# EAGLE board speaker_amp_single (EAGLE 6.3)
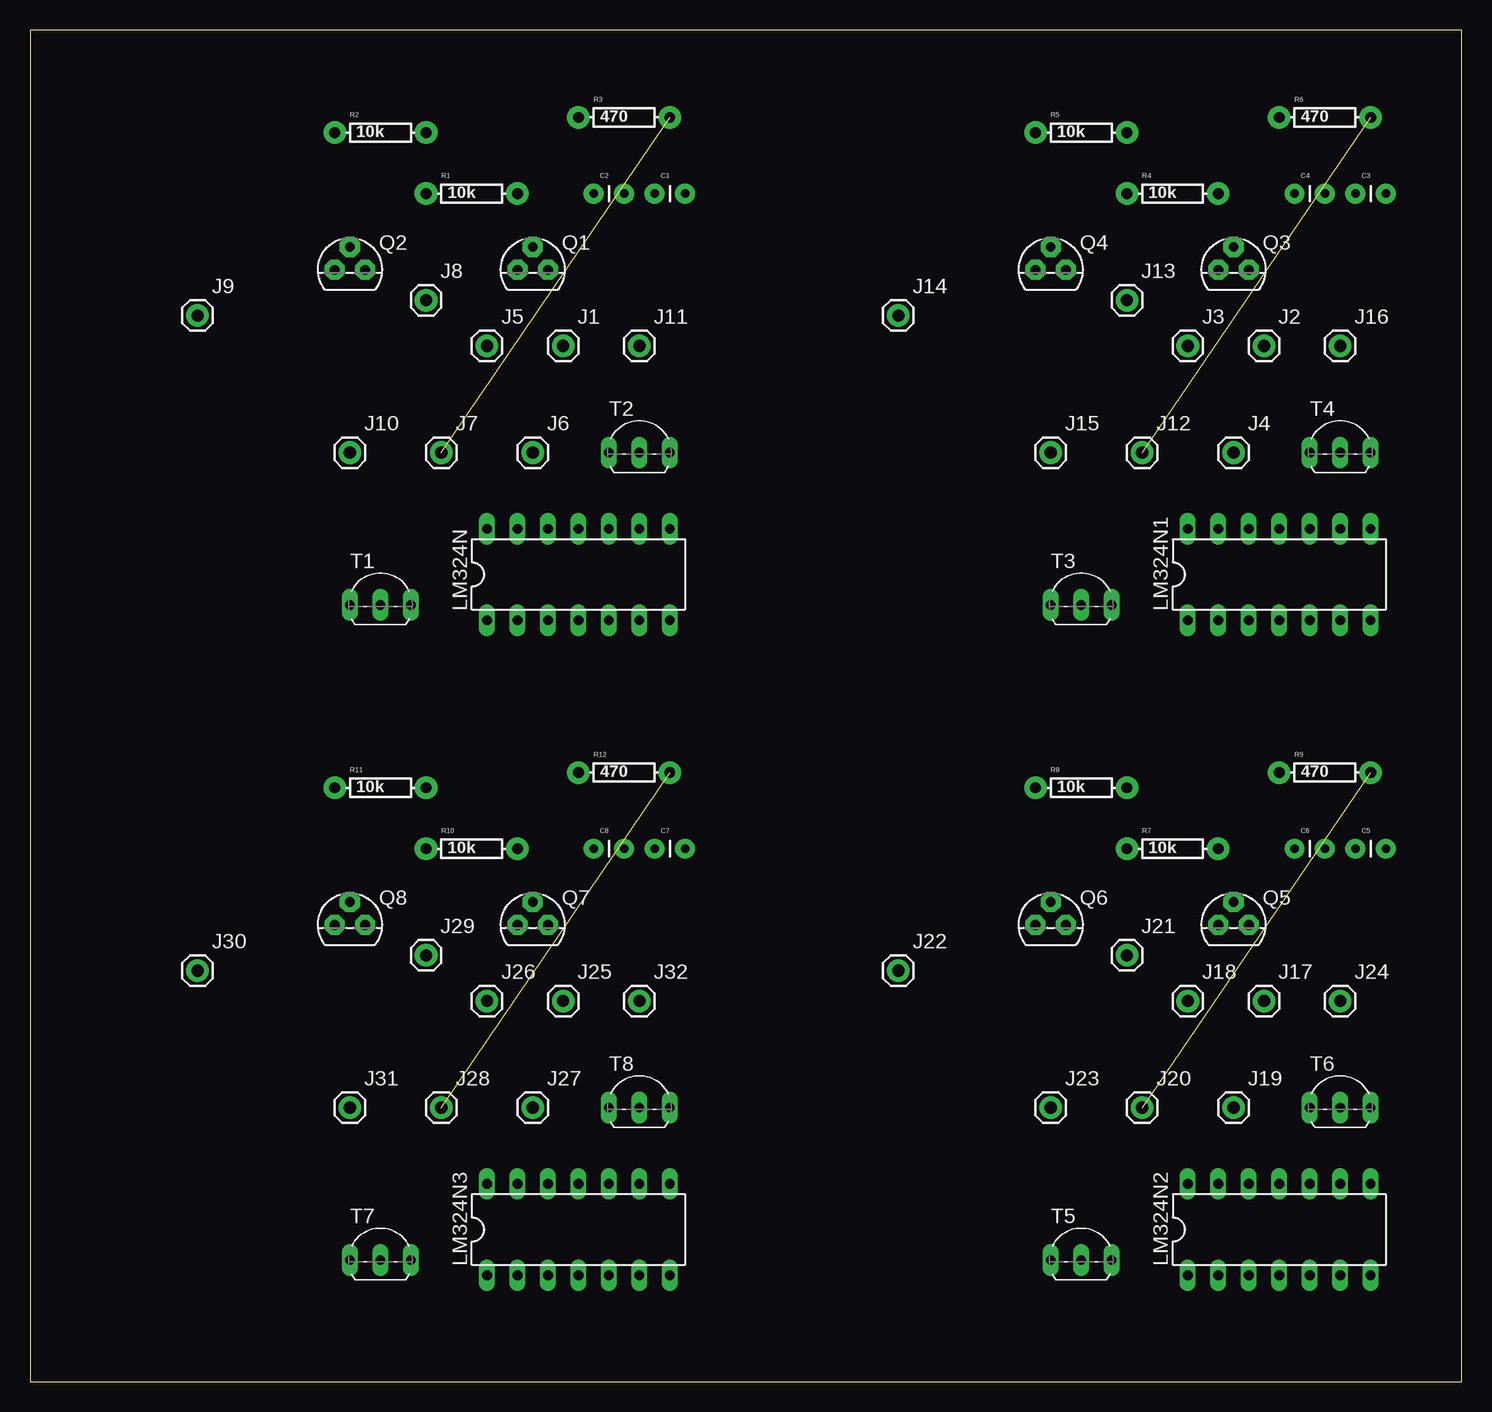
[diagram p0: board, top side]
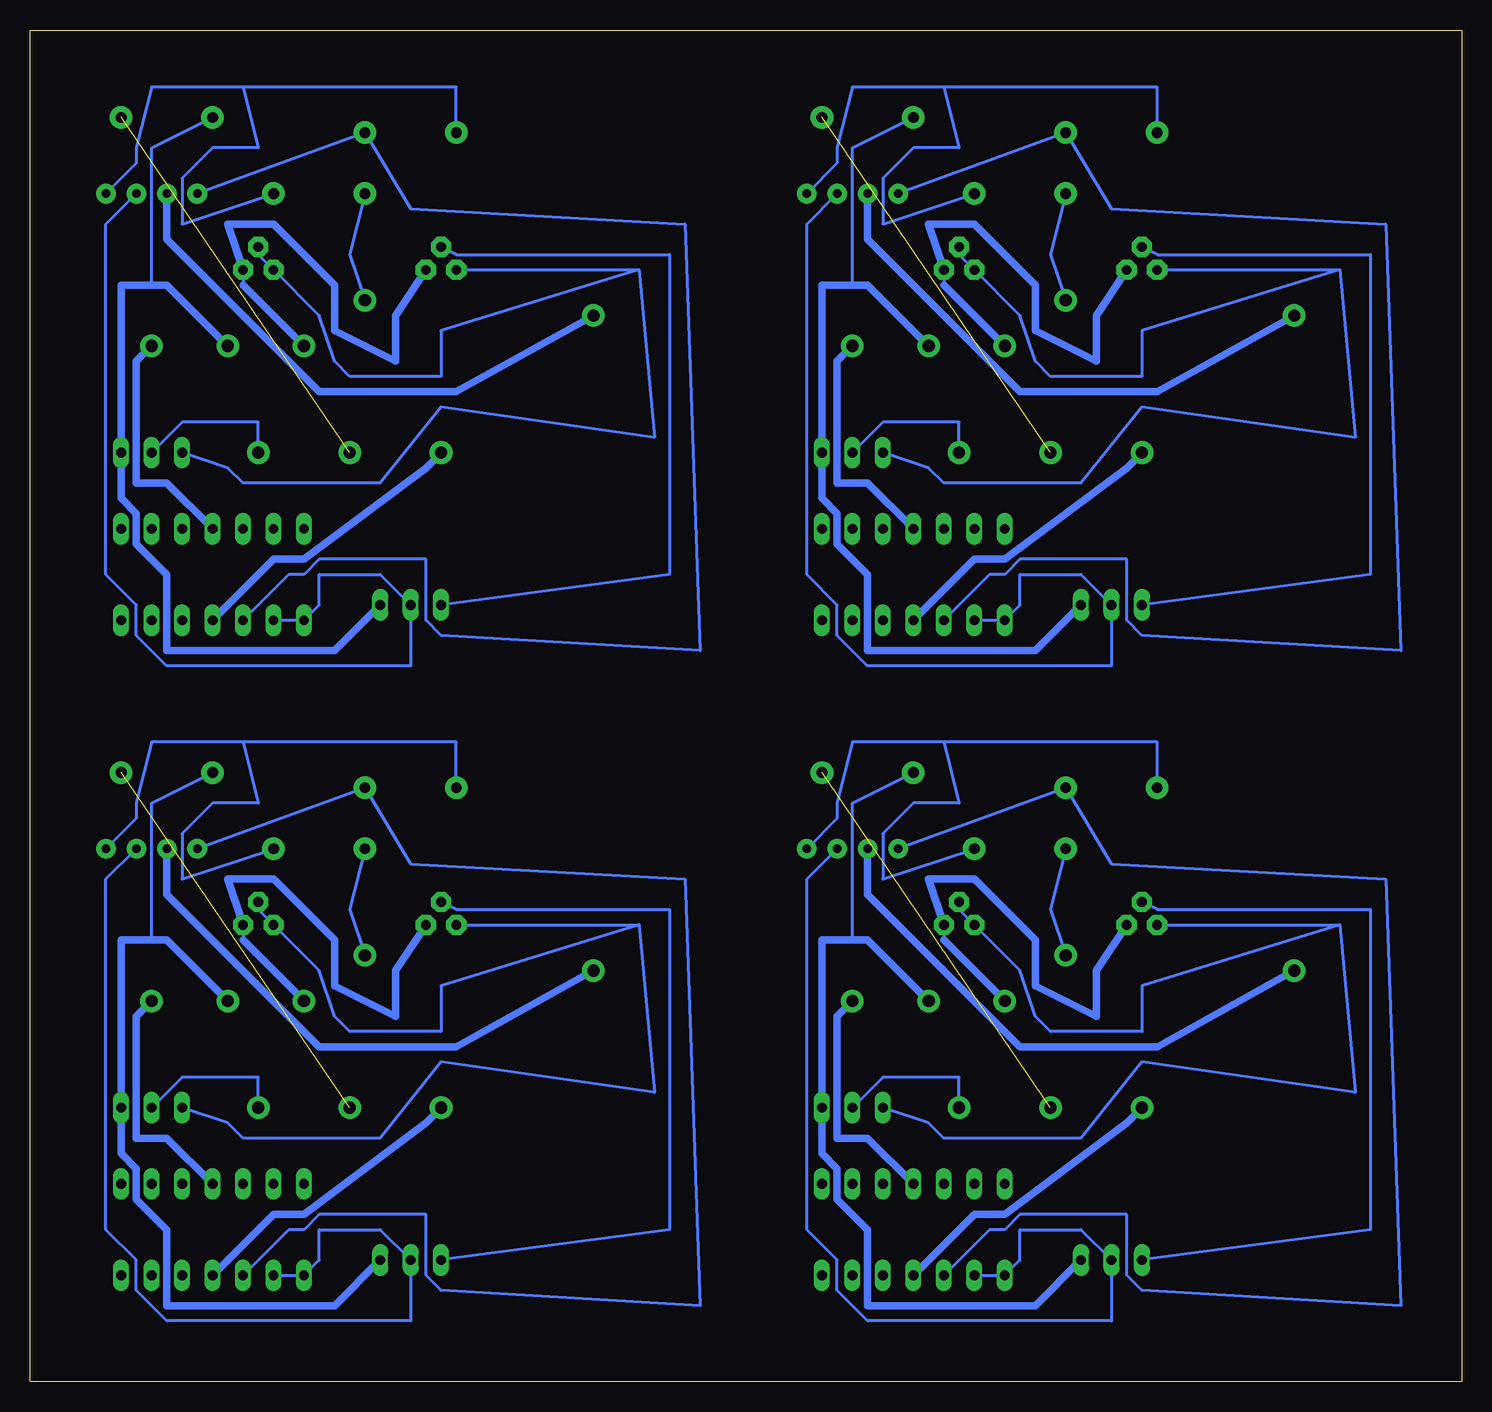
[diagram p1: board, bottom side, seen from below]

Size 119.36 x 112.7 mm. Coordinates in mm from the lower left corner, seen from the top.
Outline: 0,0 119.36,0 119.36,112.7 0,112.7 0,0
Copper layers (1*16): Top 0.035mm / dielectric 1.5mm / Bottom 0.035mm
Design rules "default *": minimum track width 10mil, minimum drill 24mil, track to track 12mil, track to pad 12mil, pad to pad 12mil, via to via 12mil, smd to smd 12mil, copper to edge 40mil, drill to drill 8mil, minimum pad ring 10mil, minimum via ring 8mil, stop-mask expansion 4mil, vias tented up to drill 0mil, thermal gap 10mil

## Footprints (pad centres in the part's own frame; a part is rotated, then mirrored left to right if it is on the bottom)
CAP-PTH-SMALL = drill 0.7 pad 1.651: 1 0,0; 2 2.54,0
1X01 = drill 1.016 pad 1.88: 1 0,0
DIL14 = drill 0.813 long: 1 -7.62,-3.81; 2 -5.08,-3.81; 3 -2.54,-3.81; 4 0,-3.81; 5 2.54,-3.81; 6 5.08,-3.81; 7 7.62,-3.81; 8 7.62,3.81; 9 5.08,3.81; 10 2.54,3.81; 11 0,3.81; 12 -2.54,3.81; 13 -5.08,3.81; 14 -7.62,3.81
TO92 = drill 0.813 pad 1.676 octagon: 1 -1.27,0; 2 0,1.905; 3 1.27,0
AXIAL-0.3 = drill 0.9 pad 1.88: P$1 -3.81,0; P$2 3.81,0
TO92-EBC-OVAL = drill 0.813 long: B 0,-1.27; C 2.54,-1.27; E -2.54,-1.27

## Placement (x,y rotation side)
C1  1n  [CAP-PTH-SMALL]  52.07,99.06 0 top
C2  0.47n  [CAP-PTH-SMALL]  46.99,99.06 0 top
C3  1n  [CAP-PTH-SMALL]  110.49,99.06 0 top
C4  0.47n  [CAP-PTH-SMALL]  105.41,99.06 0 top
C5  1n  [CAP-PTH-SMALL]  110.49,44.45 0 top
C6  0.47n  [CAP-PTH-SMALL]  105.41,44.45 0 top
C7  1n  [CAP-PTH-SMALL]  52.07,44.45 0 top
C8  0.47n  [CAP-PTH-SMALL]  46.99,44.45 0 top
J1  5v  [1X01]  44.45,86.36 0 top
J2  5v  [1X01]  102.87,86.36 0 top
J3  gnd  [1X01]  96.52,86.36 0 top
J4  short 3  [1X01]  100.33,77.47 0 top
J5  gnd  [1X01]  38.1,86.36 0 top
J6  short 3  [1X01]  41.91,77.47 0 top
J7  short 2  [1X01]  34.29,77.47 0 top
J8  input  [1X01]  33.02,90.17 0 top
J9  gnd  [1X01]  13.97,88.9 0 top
J10  12v  [1X01]  26.67,77.47 0 top
J11  gnd  [1X01]  50.8,86.36 0 top
J12  short 2  [1X01]  92.71,77.47 0 top
J13  input  [1X01]  91.44,90.17 0 top
J14  gnd  [1X01]  72.39,88.9 0 top
J15  12v  [1X01]  85.09,77.47 0 top
J16  gnd  [1X01]  109.22,86.36 0 top
J17  5v  [1X01]  102.87,31.75 0 top
J18  gnd  [1X01]  96.52,31.75 0 top
J19  short 3  [1X01]  100.33,22.86 0 top
J20  short 2  [1X01]  92.71,22.86 0 top
J21  input  [1X01]  91.44,35.56 0 top
J22  gnd  [1X01]  72.39,34.29 0 top
J23  12v  [1X01]  85.09,22.86 0 top
J24  gnd  [1X01]  109.22,31.75 0 top
J25  5v  [1X01]  44.45,31.75 0 top
J26  gnd  [1X01]  38.1,31.75 0 top
J27  short 3  [1X01]  41.91,22.86 0 top
J28  short 2  [1X01]  34.29,22.86 0 top
J29  input  [1X01]  33.02,35.56 0 top
J30  gnd  [1X01]  13.97,34.29 0 top
J31  12v  [1X01]  26.67,22.86 0 top
J32  gnd  [1X01]  50.8,31.75 0 top
LM324N  1  [DIL14]  45.72,67.31 0 top
LM324N1  1  [DIL14]  104.14,67.31 0 top
LM324N2  1  [DIL14]  104.14,12.7 0 top
LM324N3  1  [DIL14]  45.72,12.7 0 top
Q1  FQN1N50C  [TO92]  41.91,92.71 0 top
Q2  FQN1N50C  [TO92]  26.67,92.71 0 top
Q3  FQN1N50C  [TO92]  100.33,92.71 0 top
Q4  FQN1N50C  [TO92]  85.09,92.71 0 top
Q5  FQN1N50C  [TO92]  100.33,38.1 0 top
Q6  FQN1N50C  [TO92]  85.09,38.1 0 top
Q7  FQN1N50C  [TO92]  41.91,38.1 0 top
Q8  FQN1N50C  [TO92]  26.67,38.1 0 top
R1  10k  [AXIAL-0.3]  36.83,99.06 0 top
R2  10k  [AXIAL-0.3]  29.21,104.14 0 top
R3  470  [AXIAL-0.3]  49.53,105.41 0 top
R4  10k  [AXIAL-0.3]  95.25,99.06 0 top
R5  10k  [AXIAL-0.3]  87.63,104.14 0 top
R6  470  [AXIAL-0.3]  107.95,105.41 0 top
R7  10k  [AXIAL-0.3]  95.25,44.45 0 top
R8  10k  [AXIAL-0.3]  87.63,49.53 0 top
R9  470  [AXIAL-0.3]  107.95,50.8 0 top
R10  10k  [AXIAL-0.3]  36.83,44.45 0 top
R11  10k  [AXIAL-0.3]  29.21,49.53 0 top
R12  470  [AXIAL-0.3]  49.53,50.8 0 top
T1  2N2222  [TO92-EBC-OVAL]  29.21,66.04 0 top
T2  2N2222  [TO92-EBC-OVAL]  50.8,78.74 0 top
T3  2N2222  [TO92-EBC-OVAL]  87.63,66.04 0 top
T4  2N2222  [TO92-EBC-OVAL]  109.22,78.74 0 top
T5  2N2222  [TO92-EBC-OVAL]  87.63,11.43 0 top
T6  2N2222  [TO92-EBC-OVAL]  109.22,24.13 0 top
T7  2N2222  [TO92-EBC-OVAL]  29.21,11.43 0 top
T8  2N2222  [TO92-EBC-OVAL]  50.8,24.13 0 top

## Library data of the parts
C1-C8 = SparkFun-Passives
J1-J32 = SparkFun-Connectors
LM324N LM324N1-LM324N3 = ic-package
Q1-Q8 T1-T8 = adafruit
R1-R12 = SparkFun-Resistors

## Nets
N$1: C1.2 R1.P$2 R2.P$1
N$2: C2.1 LM324N.3 R2.P$2
N$3: C1.1 LM324N.1 LM324N.2 T1.B
N$4: Q2.2 T1.E
N$5: Q1.1 Q1.2 Q2.1 T2.E
N$6: J7.1 R3.P$2
N$7: J11.1 LM324N.11
N$8: J6.1 T2.B
N$9: J8.1 R1.P$1
N$10: J1.1 R3.P$1 T1.C T2.C
N$11: C2.2 J9.1
N$12: J5.1 Q1.3 Q2.3
N$13: C3.2 R4.P$2 R5.P$1
N$14: J10.1 LM324N.4
N$15: C4.1 LM324N1.3 R5.P$2
N$16: C3.1 LM324N1.1 LM324N1.2 T3.B
N$17: Q4.2 T3.E
N$18: Q3.1 Q3.2 Q4.1 T4.E
N$19: J2.1 R6.P$1 T3.C T4.C
N$20: J3.1 Q3.3 Q4.3
N$21: J16.1 LM324N1.11
N$22: J4.1 T4.B
N$23: J13.1 R4.P$1
N$24: C4.2 J14.1
N$25: J15.1 LM324N1.4
N$26: J12.1 R6.P$2
N$27: C5.2 R7.P$2 R8.P$1
N$28: C6.1 LM324N2.3 R8.P$2
N$29: C5.1 LM324N2.1 LM324N2.2 T5.B
N$30: Q6.2 T5.E
N$31: Q5.1 Q5.2 Q6.1 T6.E
N$32: J17.1 R9.P$1 T5.C T6.C
N$33: J18.1 Q5.3 Q6.3
N$34: J24.1 LM324N2.11
N$35: J19.1 T6.B
N$36: J21.1 R7.P$1
N$37: C6.2 J22.1
N$38: J23.1 LM324N2.4
N$39: J20.1 R9.P$2
N$40: C7.2 R10.P$2 R11.P$1
N$41: C8.1 LM324N3.3 R11.P$2
N$42: C7.1 LM324N3.1 LM324N3.2 T7.B
N$43: Q8.2 T7.E
N$44: Q7.1 Q7.2 Q8.1 T8.E
N$45: J25.1 R12.P$1 T7.C T8.C
N$46: J26.1 Q7.3 Q8.3
N$47: J32.1 LM324N3.11
N$48: J27.1 T8.B
N$49: J29.1 R10.P$1
N$50: C8.2 J30.1
N$51: J31.1 LM324N3.4
N$52: J28.1 R12.P$2

## Tracks (layer width: path | path; a pad name or v marks a point on that pad's centre or on a via)
N$1
  Bottom 0.254: C1.2 52.07,101.6 52.07,102.87 50.8,107.95 43.18,107.95 | 43.18,107.95 25.4,107.95 R2.P$1 | R1.P$2 48.26,96.52 48.26,100.33 45.72,102.87 41.91,102.87 43.18,107.95
N$2
  Bottom 0.254: LM324N.3 39.37,67.31 38.1,67.31 36.83,68.58 27.94,68.58 27.94,63.5 26.67,62.23 5.08,60.96 6.35,96.52 29.21,97.79 R2.P$2 C2.1
N$3
  Bottom 0.254: LM324N.2 LM324N.1 36.83,64.77 36.83,67.31 31.75,67.31 T1.B 29.21,59.69 49.53,59.69 52.07,62.23 52.07,64.77 54.61,67.31 54.61,96.52 C1.1
N$4
  Bottom 0.254: T1.E 7.62,67.31 7.62,93.98 25.4,93.98 Q2.2
N$5
  Bottom 0.254: Q1.2 41.91,93.98 Q1.1 36.83,88.9 35.56,85.09 34.29,83.82 26.67,83.82 26.67,87.63 10.16,92.71 | T2.E 44.45,76.2 43.18,74.93 31.75,74.93 26.67,81.28 8.89,78.74 10.16,92.71 | Q2.1 10.16,92.71
N$6  (1 unrouted)
N$7
  Bottom 0.61: LM324N.11 49.53,74.93 52.07,74.93 52.07,85.09 J11.1
N$8
  Bottom 0.254: T2.B 48.26,80.01 41.91,80.01 J6.1
N$9
  Bottom 0.254: J8.1 34.29,93.98 R1.P$1
N$10
  Bottom 0.254: R3.P$1 50.8,102.87 50.8,91.44
  Bottom 0.61: T1.C 35.56,60.96 49.53,60.96 49.53,67.31 52.07,69.85 52.07,72.39 53.34,73.66 T2.C 53.34,91.44 50.8,91.44 49.53,91.44 J1.1
N$11
  Bottom 0.61: C2.2 49.53,95.25 36.83,82.55 25.4,82.55 J9.1
N$12
  Bottom 0.254: Q1.3 43.18,91.44
  Bottom 0.61: Q2.3 30.48,88.9 30.48,85.09 35.56,87.63 35.56,91.44 40.64,96.52 44.45,96.52 Q1.3 | 43.18,91.44 J5.1
N$13
  Bottom 0.254: C3.2 110.49,101.6 110.49,102.87 109.22,107.95 101.6,107.95 | 101.6,107.95 83.82,107.95 R5.P$1 | R4.P$2 106.68,96.52 106.68,100.33 104.14,102.87 100.33,102.87 101.6,107.95
N$14
  Bottom 0.61: LM324N.4 40.64,68.58 38.1,68.58 27.94,76.2 J10.1
N$15
  Bottom 0.254: LM324N1.3 97.79,67.31 96.52,67.31 95.25,68.58 86.36,68.58 86.36,63.5 85.09,62.23 63.5,60.96 64.77,96.52 87.63,97.79 R5.P$2 C4.1
N$16
  Bottom 0.254: LM324N1.2 LM324N1.1 95.25,64.77 95.25,67.31 90.17,67.31 T3.B 87.63,59.69 107.95,59.69 110.49,62.23 110.49,64.77 113.03,67.31 113.03,96.52 C3.1
N$17
  Bottom 0.254: T3.E 66.04,67.31 66.04,93.98 83.82,93.98 Q4.2
N$18
  Bottom 0.254: Q3.2 100.33,93.98 Q3.1 95.25,88.9 93.98,85.09 92.71,83.82 85.09,83.82 85.09,87.63 68.58,92.71 | T4.E 102.87,76.2 101.6,74.93 90.17,74.93 85.09,81.28 67.31,78.74 68.58,92.71 | Q4.1 68.58,92.71
N$19
  Bottom 0.254: R6.P$1 109.22,102.87 109.22,91.44
  Bottom 0.61: T3.C 93.98,60.96 107.95,60.96 107.95,67.31 110.49,69.85 110.49,72.39 111.76,73.66 T4.C 111.76,91.44 109.22,91.44 107.95,91.44 J2.1
N$20
  Bottom 0.254: Q3.3 101.6,91.44
  Bottom 0.61: Q4.3 88.9,88.9 88.9,85.09 93.98,87.63 93.98,91.44 99.06,96.52 102.87,96.52 Q3.3 | 101.6,91.44 J3.1
N$21
  Bottom 0.61: LM324N1.11 107.95,74.93 110.49,74.93 110.49,85.09 J16.1
N$22
  Bottom 0.254: T4.B 106.68,80.01 100.33,80.01 J4.1
N$23
  Bottom 0.254: J13.1 92.71,93.98 R4.P$1
N$24
  Bottom 0.61: C4.2 107.95,95.25 95.25,82.55 83.82,82.55 J14.1
N$25
  Bottom 0.61: LM324N1.4 99.06,68.58 96.52,68.58 86.36,76.2 J15.1
N$26  (1 unrouted)
N$27
  Bottom 0.254: C5.2 110.49,46.99 110.49,48.26 109.22,53.34 101.6,53.34 | 101.6,53.34 83.82,53.34 R8.P$1 | R7.P$2 106.68,41.91 106.68,45.72 104.14,48.26 100.33,48.26 101.6,53.34
N$28
  Bottom 0.254: LM324N2.3 97.79,12.7 96.52,12.7 95.25,13.97 86.36,13.97 86.36,8.89 85.09,7.62 63.5,6.35 64.77,41.91 87.63,43.18 R8.P$2 C6.1
N$29
  Bottom 0.254: LM324N2.2 LM324N2.1 95.25,10.16 95.25,12.7 90.17,12.7 T5.B 87.63,5.08 107.95,5.08 110.49,7.62 110.49,10.16 113.03,12.7 113.03,41.91 C5.1
N$30
  Bottom 0.254: T5.E 66.04,12.7 66.04,39.37 83.82,39.37 Q6.2
N$31
  Bottom 0.254: Q5.2 100.33,39.37 Q5.1 95.25,34.29 93.98,30.48 92.71,29.21 85.09,29.21 85.09,33.02 68.58,38.1 | T6.E 102.87,21.59 101.6,20.32 90.17,20.32 85.09,26.67 67.31,24.13 68.58,38.1 | Q6.1 68.58,38.1
N$32
  Bottom 0.254: R9.P$1 109.22,48.26 109.22,36.83
  Bottom 0.61: T5.C 93.98,6.35 107.95,6.35 107.95,12.7 110.49,15.24 110.49,17.78 111.76,19.05 T6.C 111.76,36.83 109.22,36.83 107.95,36.83 J17.1
N$33
  Bottom 0.254: Q5.3 101.6,36.83
  Bottom 0.61: Q6.3 88.9,34.29 88.9,30.48 93.98,33.02 93.98,36.83 99.06,41.91 102.87,41.91 Q5.3 | 101.6,36.83 J18.1
N$34
  Bottom 0.61: LM324N2.11 107.95,20.32 110.49,20.32 110.49,30.48 J24.1
N$35
  Bottom 0.254: T6.B 106.68,25.4 100.33,25.4 J19.1
N$36
  Bottom 0.254: J21.1 92.71,39.37 R7.P$1
N$37
  Bottom 0.61: C6.2 107.95,40.64 95.25,27.94 83.82,27.94 J22.1
N$38
  Bottom 0.61: LM324N2.4 99.06,13.97 96.52,13.97 86.36,21.59 J23.1
N$39  (1 unrouted)
N$40
  Bottom 0.254: C7.2 52.07,46.99 52.07,48.26 50.8,53.34 43.18,53.34 | 43.18,53.34 25.4,53.34 R11.P$1 | R10.P$2 48.26,41.91 48.26,45.72 45.72,48.26 41.91,48.26 43.18,53.34
N$41
  Bottom 0.254: LM324N3.3 39.37,12.7 38.1,12.7 36.83,13.97 27.94,13.97 27.94,8.89 26.67,7.62 5.08,6.35 6.35,41.91 29.21,43.18 R11.P$2 C8.1
N$42
  Bottom 0.254: LM324N3.2 LM324N3.1 36.83,10.16 36.83,12.7 31.75,12.7 T7.B 29.21,5.08 49.53,5.08 52.07,7.62 52.07,10.16 54.61,12.7 54.61,41.91 C7.1
N$43
  Bottom 0.254: T7.E 7.62,12.7 7.62,39.37 25.4,39.37 Q8.2
N$44
  Bottom 0.254: Q7.2 41.91,39.37 Q7.1 36.83,34.29 35.56,30.48 34.29,29.21 26.67,29.21 26.67,33.02 10.16,38.1 | T8.E 44.45,21.59 43.18,20.32 31.75,20.32 26.67,26.67 8.89,24.13 10.16,38.1 | Q8.1 10.16,38.1
N$45
  Bottom 0.254: R12.P$1 50.8,48.26 50.8,36.83
  Bottom 0.61: T7.C 35.56,6.35 49.53,6.35 49.53,12.7 52.07,15.24 52.07,17.78 53.34,19.05 T8.C 53.34,36.83 50.8,36.83 49.53,36.83 J25.1
N$46
  Bottom 0.254: Q7.3 43.18,36.83
  Bottom 0.61: Q8.3 30.48,34.29 30.48,30.48 35.56,33.02 35.56,36.83 40.64,41.91 44.45,41.91 Q7.3 | 43.18,36.83 J26.1
N$47
  Bottom 0.61: LM324N3.11 49.53,20.32 52.07,20.32 52.07,30.48 J32.1
N$48
  Bottom 0.254: T8.B 48.26,25.4 41.91,25.4 J27.1
N$49
  Bottom 0.254: J29.1 34.29,39.37 R10.P$1
N$50
  Bottom 0.61: C8.2 49.53,40.64 36.83,27.94 25.4,27.94 J30.1
N$51
  Bottom 0.61: LM324N3.4 40.64,13.97 38.1,13.97 27.94,21.59 J31.1
N$52  (1 unrouted)